# EAGLE board Temp Controller (EAGLE 6.3)
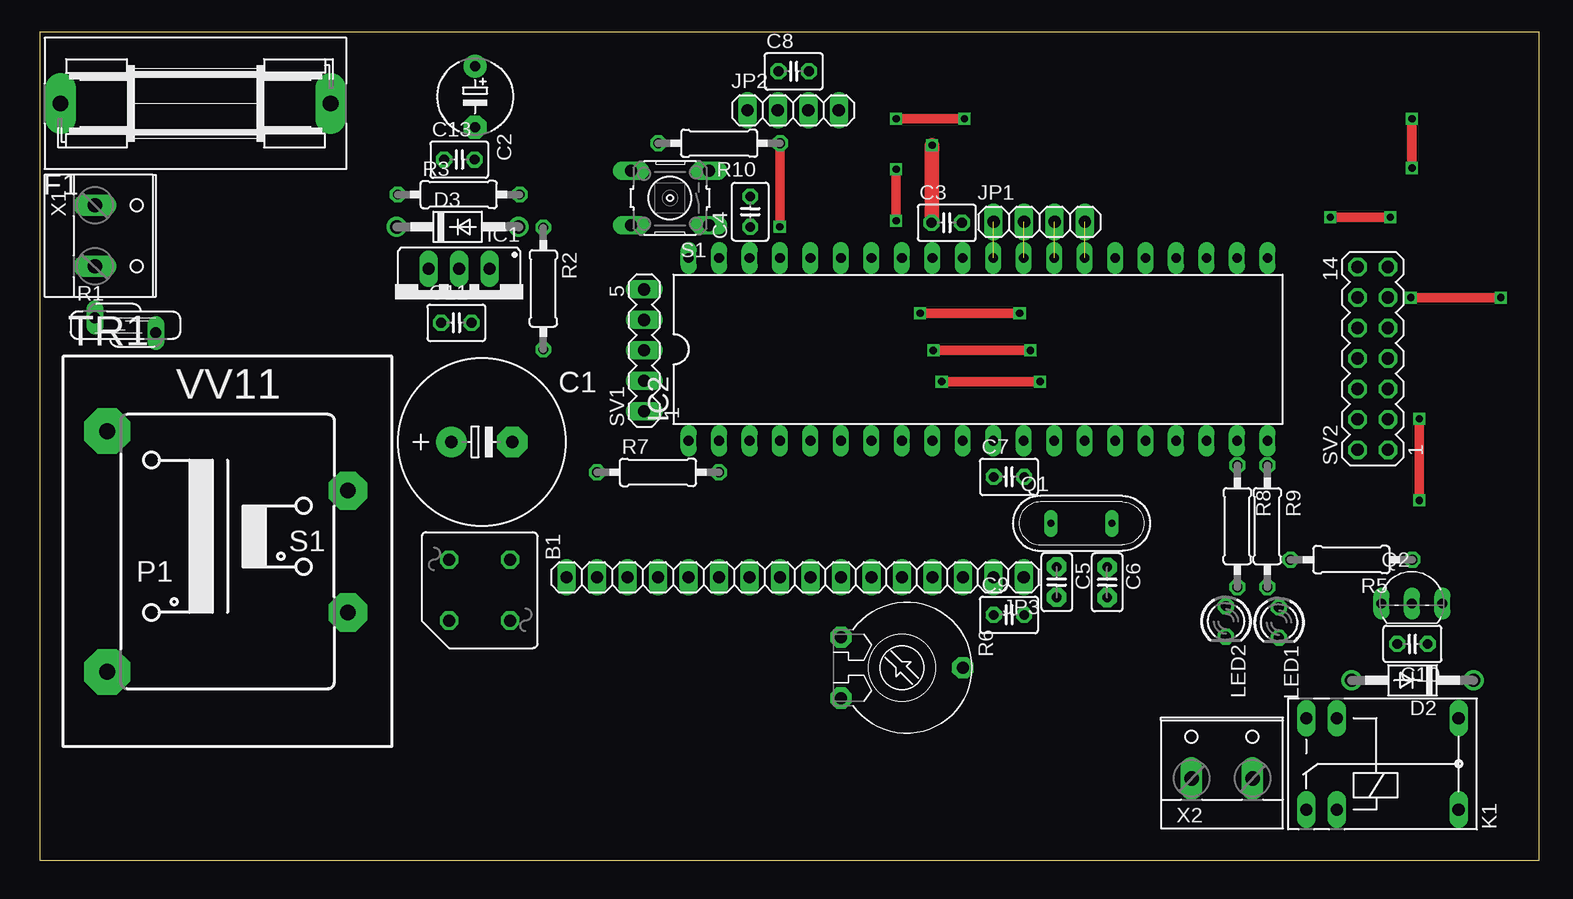
[diagram p0: board, top side]
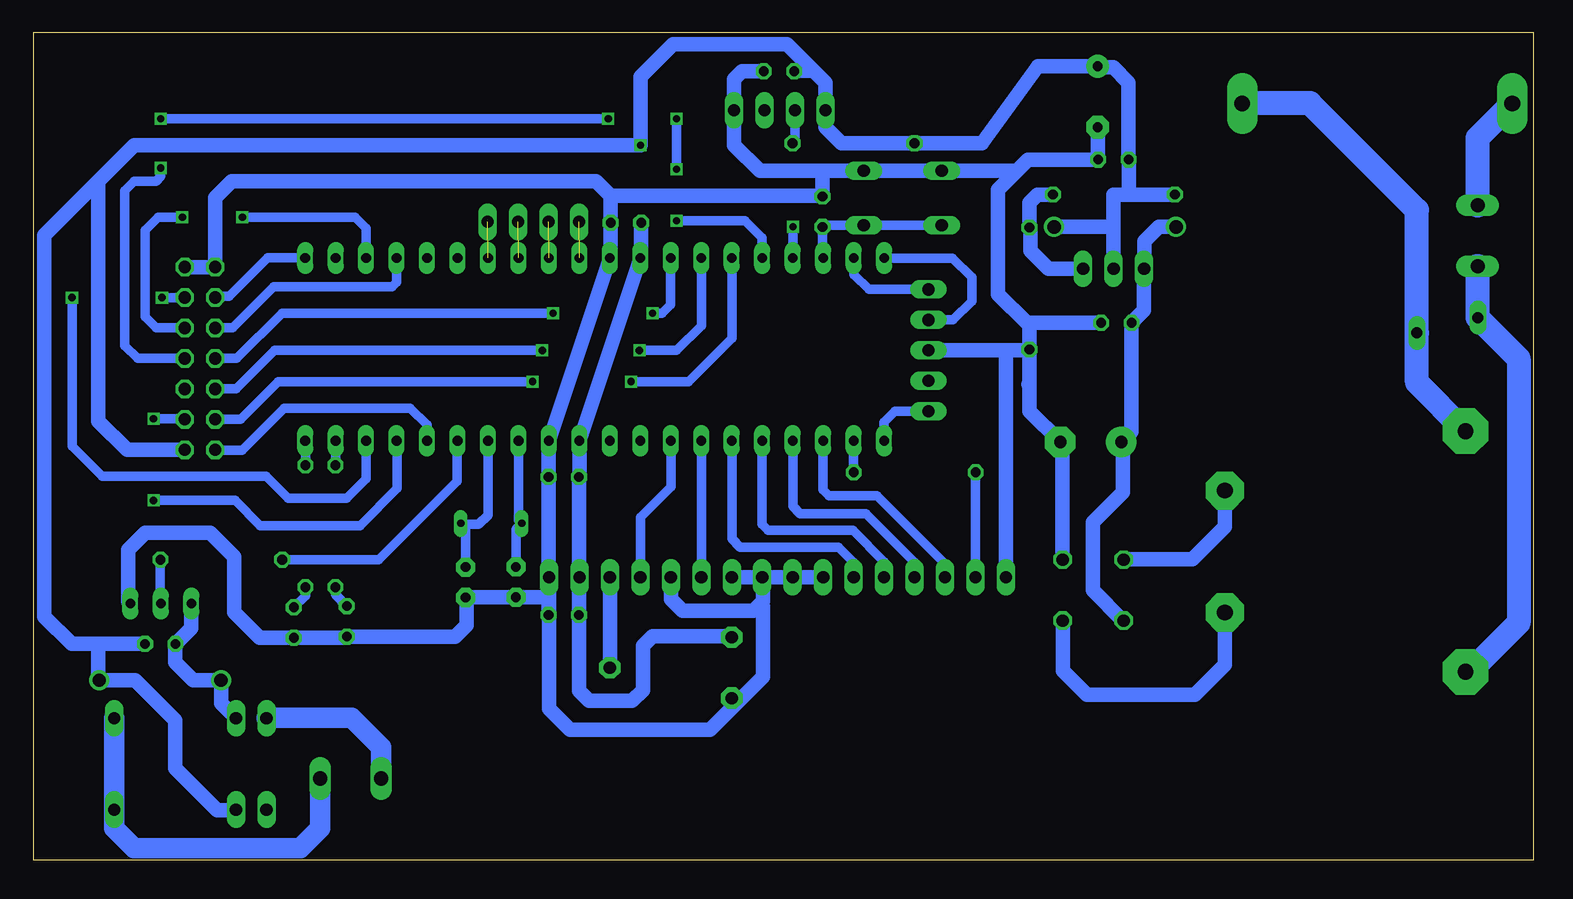
[diagram p1: board, bottom side, seen from below]

Size 125 x 69 mm. Coordinates in mm from the lower left corner, seen from the top.
Outline: 0,0 125,0 125,69 0,69 0,0
Copper layers (1*16): Top 0.035mm / dielectric 1.5mm / Bottom 0.035mm
Design rules "default": minimum track width 10mil, minimum drill 24mil, track to track 8mil, track to pad 8mil, pad to pad 8mil, via to via 8mil, smd to smd 8mil, copper to edge 40mil, drill to drill 8mil, minimum pad ring 10mil, minimum via ring 8mil, stop-mask expansion 4mil, vias tented up to drill 0mil, thermal gap 10mil

## Footprints (pad centres in the part's own frame; a part is rotated, then mirrored left to right if it is on the bottom)
1KAB = drill 1.016 octagon: + 2.54,-2.54; - -2.54,2.54; AC1 -2.54,-2.54; AC2 2.54,2.54
E5-13 = drill 1.016 pad 2.54: + -2.54,0 | drill 1.016 pad 2.54 octagon: - 2.54,0
E5-6 = drill 0.813 pad 1.905: + -2.54,0 | drill 0.813 pad 1.905 octagon: - 2.54,0
C025-030X050 = drill 0.813 octagon: 1 -1.27,0; 2 1.27,0
C2.5-2 = drill 0.813 pad 1.6 octagon: 1 -1.27,0; 2 1.27,0
DO41-10 = drill 1.118: A 5.08,0; C -5.08,0
SH22,5A = drill 1.321 pad 2.54 long: 1 -11.252,0; 2 11.252,0
317TS = drill 1.016 long: 1 -2.54,-2.54; 2 0,-2.54; 3 2.54,-2.54
DIL40 = drill 0.813 long: 1 -24.13,-7.62; 2 -21.59,-7.62; 3 -19.05,-7.62; 4 -16.51,-7.62; 5 -13.97,-7.62; 6 -11.43,-7.62; 7 -8.89,-7.62; 8 -6.35,-7.62; 9 -3.81,-7.62; 10 -1.27,-7.62; 11 1.27,-7.62; 12 3.81,-7.62; 13 6.35,-7.62; 14 8.89,-7.62; 15 11.43,-7.62; 16 13.97,-7.62; 17 16.51,-7.62; 18 19.05,-7.62; 19 21.59,-7.62; 20 24.13,-7.62; 21 24.13,7.62; 22 21.59,7.62; 23 19.05,7.62; 24 16.51,7.62; 25 13.97,7.62; 26 11.43,7.62; 27 8.89,7.62; 28 6.35,7.62; 29 3.81,7.62; 30 1.27,7.62; 31 -1.27,7.62; 32 -3.81,7.62; 33 -6.35,7.62; 34 -8.89,7.62; 35 -11.43,7.62; 36 -13.97,7.62; 37 -16.51,7.62; 38 -19.05,7.62; 39 -21.59,7.62; 40 -24.13,7.62
1X04 = drill 1.016 long: 1 -3.81,0; 2 -1.27,0; 3 1.27,0; 4 3.81,0
1X16 = drill 1.016 long: 1 -19.05,0; 2 -16.51,0; 3 -13.97,0; 4 -11.43,0; 5 -8.89,0; 6 -6.35,0; 7 -3.81,0; 8 -1.27,0; 9 1.27,0; 10 3.81,0; 11 6.35,0; 12 8.89,0; 13 11.43,0; 14 13.97,0; 15 16.51,0; 16 19.05,0
M3XXH = drill 1.016 long: 1 -3.81,3.81; 2 -3.81,-3.81; O -6.35,-3.81; P 6.35,-3.81; P@ 6.35,3.81; S -6.35,3.81
LED3MM = drill 0.813 octagon: A -1.27,0; K 1.27,0
QS = drill 0.61 long: 1 -2.54,0; 2 2.54,0
TO92-EBC = drill 0.813 long: B 0,-1.27; C -2.54,-1.27; E 2.54,-1.27
S07K11 = drill 0.914 long: 1 -0.635,-2.54; 2 0.635,2.54
0207/10 = drill 0.813 octagon: 1 -5.08,0; 2 5.08,0
PT-10 = drill 1.016 pad 1.778 octagon: 1 -2.54,-5.08; 2 2.54,-5.08; 3 0,5.08
B3F-10XX = drill 1.016 long: 1 -3.251,2.261; 2 3.251,2.261; 3 -3.251,-2.261; 4 3.251,-2.261
MA05-1 = drill 1.016 long: 1 -5.08,0; 2 -2.54,0; 3 0,0; 4 2.54,0; 5 5.08,0
MA07-2 = drill 1.016 octagon: 1 -7.62,-1.27; 2 -7.62,1.27; 3 -5.08,-1.27; 4 -5.08,1.27; 5 -2.54,-1.27; 6 -2.54,1.27; 7 0,-1.27; 8 0,1.27; 9 2.54,-1.27; 10 2.54,1.27; 11 5.08,-1.27; 12 5.08,1.27; 13 7.62,-1.27; 14 7.62,1.27
VV11 = drill 1.321 pad 3.81 octagon: 1 -10.033,10.033; 5 -10.033,-10.033 | drill 1.321 pad 3.175 octagon: 7 10.033,-5.08; 9 10.033,5.08
W237-132 = drill 1.194 long: 1 -2.54,-0.635; 2 2.54,-0.635

## Placement (x,y rotation side)
B1  [1KAB]  36.68,22.52 270 top
C1  1000uF  [E5-13]  36.87,34.87 0 top
C2  20uF  [E5-6]  36.3,63.64 270 top
C3  [C025-030X050]  75.62,53.14 0 top
C4  [C025-030X050]  59.24,54.06 90 top
C5  [C2.5-2]  84.79,23.19 270 top
C6  [C2.5-2]  88.99,23.17 270 top
C7  [C025-030X050]  80.81,31.96 0 top
C8  [C025-030X050]  62.86,65.76 0 top
C9  [C025-030X050]  80.81,20.46 0 top
C10  [C025-030X050]  114.44,18.04 180 top
C11  1uF  [C025-030X050]  34.74,44.8 0 top
C13  1uF  [C025-030X050]  34.99,58.4 0 top
D2  1N4004  [DO41-10]  114.45,15.01 180 top
D3  1N4004  [DO41-10]  34.85,52.79 0 top
F1  FUSESH22,5A  [SH22,5A]  13,63.08 0 top
IC1  [317TS]  34.97,46.76 180 top
IC2  PIC16F1939P  [DIL40]  78.23,42.59 0 top
JP1  [1X04]  83.34,53.21 0 top
JP2  [1X04]  62.81,62.51 0 top
JP3  [1X16]  62.99,23.59 180 top
K1  M3XXH  [M3XXH]  111.94,8.04 0 top
LED1  [LED3MM]  103.31,19.82 270 top
LED2  [LED3MM]  98.89,19.92 270 top
Q1  [QS]  86.85,28.09 0 top
Q2  BC549B  [TO92-EBC]  114.39,22.67 0 top
R1  S07K11  [S07K11]  7.15,44.6 270 top
R2  [0207/10]  41.99,47.66 270 top
R3  [0207/10]  34.94,55.49 0 top
R5  [0207/10]  109.35,25.06 180 top
R6  [PT-10]  71.88,16.06 270 top
R7  [0207/10]  51.55,32.34 0 top
R8  [0207/10]  99.84,27.85 270 top
R9  [0207/10]  102.34,27.85 270 top
R10  [0207/10]  56.65,59.76 180 top
S1  [B3F-10XX]  52.55,55.2 180 top
SV1  [MA05-1]  50.4,42.5 90 top
SV2  [MA07-2]  111.13,41.83 90 top
TR1  [VV11]  15.67,25.74 0 top
X1  [W237-132]  5.25,52.06 270 top
X2  [W237-132]  98.57,7.47 0 top

## Library data of the parts
B1 = rectifier
C1-C4 C7-C11 C13 R6 = rcl
C5 C6 = capacitor-wima
D2 D3 = diode
F1 = fuse; OC_FARNELL: unknown; OC_NEWARK: unknown
IC1 = v-reg
IC2 = microchip-update-2
JP1 JP2 = nrf905
JP3 = pinhead
K1 = relay
LED1 LED2 = led
Q1 = special
Q2 = transistor-npn
R1 = varistor
R2 R3 R5 R7-R10 = resistor
S1 = switch-omron
SV1 SV2 = con-lstb
TR1 = trafo
X1 X2 = con-wago-508

## Nets
GND: B1.- C1.- C2.- C3.2 C4.2 C5.2 C6.2 C7.2 C8.2 C9.2 C11.2 C13.2 IC2.12 IC2.31 JP2.4 JP3.1 JP3.5 JP3.7 JP3.8 JP3.9 JP3.10 JP3.16 LED1.K LED2.K Q2.E R2.2 R6.2 S1.3 S1.4 SV1.3 SV2.13 SV2.14
N$1: F1.1 X1.1
N$2: F1.2 R1.2 TR1.1
N$3: R1.1 TR1.5 X1.2
N$4: IC2.33 SV2.8
N$5: B1.AC1 TR1.9
N$6: B1.AC2 TR1.7
N$7: IC2.30 JP1.1
N$8: B1.+ C1.+ C11.1 D3.C IC1.3
N$9: IC2.34 SV2.6
N$10: IC2.18 SV2.11
N$11: IC2.1 SV1.1
N$12: IC2.40 SV1.4
N$13: IC2.39 SV1.5
N$14: C5.1 IC2.13 Q1.1
N$15: C6.1 IC2.14 Q1.2
N$16: IC2.2 R7.2
N$17: IC2.29 JP1.2
N$18: IC2.23 SV2.9
N$19: IC2.24 SV2.10
N$20: IC2.21 SV2.12
N$21: IC2.16 SV2.2
N$22: IC2.17 SV2.3
N$23: JP3.15 R7.1
N$24: IC2.36 SV2.7
N$25: IC2.35 SV2.4
N$26: IC2.3 JP3.14
N$27: IC2.4 JP3.13
N$28: IC2.5 JP3.12
N$29: IC2.6 JP3.11
N$30: IC2.7 JP3.6
N$31: IC2.8 JP3.4
N$32: JP3.3 R6.3
N$34: IC2.28 JP1.3
N$35: IC1.1 R2.1 R3.2
N$36: LED1.A R9.2
N$37: LED2.A R8.2
N$38: IC2.27 JP1.4
N$40: IC2.20 R9.1
N$41: IC2.19 R8.1
N$42: C4.1 IC2.38 S1.1 S1.2
N$43: C10.2 D2.A K1.1 Q2.C
N$44: IC2.15 R5.2
N$45: Q2.B R5.1
N$46: K1.S X2.1
N$47: K1.P K1.P@ X2.2
N$50: IC2.37 JP2.2 R10.1
VCC/2: C2.+ C3.1 C7.1 C8.1 C9.1 C10.1 C13.1 D2.C D3.A IC1.2 IC2.11 IC2.32 JP2.1 JP3.2 K1.2 R3.1 R6.1 R10.2 SV2.1

## Tracks (layer width: path | path; a pad name or v marks a point on that pad's centre or on a via)
GND
  Bottom 1.2: B1.- 39.22,34.68 C1.- 41.99,37.45 41.99,39.8 | 41.99,39.8 R2.2 | 42.2,44.8 C11.2 | 43.04,57.46 44.6,55.9 44.6,47.2 42.2,44.8 | R2.2 41.99,44.59 42.2,44.8 | C3.2 76.89,50.28 IC2.31 IC2.12 82.08,34.93 C7.2 82.08,23.63 JP3.1 | SV2.13 SV2.14 109.86,55.24 108.5,56.6 78.1,56.6 76.9,55.4 | JP3.10 JP3.9 JP3.8 | JP3.8 JP3.7 | JP3.5 71.88,21.78 70.9,20.8 65,20.8 64.4,21.4 | 64.4,21.4 64.2,21.6 64.2,23.53 JP3.8 | R6.2 65.98,13.52 | 65.98,13.52 64.2,15.3 64.2,21.2 64.4,21.4 | C9.2 82.08,21.6 | 82.08,21.6 82.08,23.55 JP3.1 | 82.08,21.6 82.4,21.92 C5.2 88.97,21.92 C6.2 88.9,21.81 88.9,19.6 89.85,18.65 LED2.K 98.99,18.55 LED1.K 106.15,18.55 108.3,20.7 108.3,25.3 110.3,27.3 115.7,27.3 117.1,25.9 117.1,21.57 Q2.E 116.99,21.34 | 59.6,57.46 S1.3 S1.4 43.04,57.46 | 59.6,57.46 64.46,57.46 66.6,59.6 66.6,62.49 JP2.4 66.6,62.53 66.6,65.1 65.94,65.76 C8.2 | 59.6,57.46 59.24,57.1 C4.2 59.31,55.4 76.9,55.4 | 76.9,55.4 C3.2 | C3.2 76.89,53.11 76.9,53.1 | C2.- 36.26,61.06 C13.2 42.1,58.4 43.04,57.46 | 42.09,39.7 41.99,39.8 | JP3.16 43.94,42.24 44.2,42.5 | JP3.1 82.04,12.64 80.3,10.9 68.6,10.9 65.98,13.52 | SV1.3 44.2,42.5 | 44.2,42.5 42.07,42.5 R2.2
N$1
  Bottom 2: X1.1 4.62,60.21 F1.1
N$2
  Bottom 2: TR1.1 9.69,39.83 R1.2 9.69,54.19 18.6,63.1 24.23,63.1 F1.2
N$3
  Bottom 2: X1.2 R1.1 1.2,41.83 1.2,19.8 5.29,15.71 TR1.5
N$4  (via drill 0.6)
  Top 0.8: v81.7,45.6 v73.4,45.6
  Bottom 0.8: SV2.8 108.07,41.83 104.3,45.6 v81.7,45.6 | v73.4,45.6 72.6,45.6 71.9,46.3 71.9,50.19 IC2.33
N$5
  Bottom 1.2: TR1.9 25.7,27.8 28.4,25.1 34.1,25.1 B1.AC1
N$6
  Bottom 1.2: TR1.7 25.7,16.3 28.2,13.8 37.2,13.8 39.2,15.8 39.2,19.96 B1.AC2
N$7  (1 unrouted)
N$8
  Bottom 1.2: B1.+ 34.18,19.98 36.7,22.5 36.7,28.2 34.2,30.7 34.2,34.74 C1.+ 33.47,35.73 C11.1 32.43,45.84 IC1.3 32.4,49.33 32.4,51.6 31.21,52.79 D3.C
N$9  (via drill 0.6)
  Top 0.8: v74.5,42.5 v82.6,42.5
  Bottom 0.8: IC2.34 69.34,44.56 71.4,42.5 v74.5,42.5 | v82.6,42.5 104.9,42.5 108.1,39.3 SV2.6
N$10  (via drill 0.6)
  Top 0.8: v121.8,46.9 v114.3,46.9
  Bottom 0.8: v114.3,46.9 SV2.11 | v121.8,46.9 121.8,34.5 119.3,32 105.6,32 103.8,30.2 98.9,30.2 97.3,31.8 97.3,34.95 IC2.18
N$11
  Bottom 0.8: SV1.1 53.18,37.42 54.1,36.5 IC2.1
N$12
  Bottom 0.8: SV1.4 48.36,45.04 46.8,46.6 46.8,48.6 48.4,50.2 IC2.40
N$13
  Bottom 0.8: SV1.5 55.38,47.58 56.6,48.8 56.6,50.17 IC2.39
N$14
  Bottom 0.8: IC2.13 84.58,28.36 Q1.1 84.79,27.61 C5.1
N$15
  Bottom 0.8: IC2.14 87.12,28.78 87.9,28 88.9,28 | 88.9,28 89.3,28 Q1.2 | C6.1 88.99,27.91 88.9,28
N$16
  Bottom 0.8: IC2.2 R7.2
N$17  (1 unrouted)
N$18  (via drill 0.6)
  Top 0.8: v112.6,53.6 v107.6,53.6
  Bottom 0.8: SV2.9 114.77,44.37 115.7,45.3 115.7,52.5 114.6,53.6 v112.6,53.6 | v107.6,53.6 98.2,53.6 97.3,52.7 97.3,50.23 IC2.23
N$19
  Bottom 0.8: IC2.24 94.74,48.16 95.1,47.8 105,47.8 108.4,44.4 109.83,44.4 SV2.10
N$20
  Bottom 0.8: IC2.21 105.49,50.21 108.7,47 109.77,47 SV2.12
N$21
  Bottom 0.8: IC2.16 92.2,36.3 93.6,37.7 104.1,37.7 107.6,34.2 SV2.2
N$22  (via drill 0.6)
  Top 0.8: v115,36.8 v115,30
  Bottom 0.8: v115,36.8 112.45,36.8 SV2.3 | v115,30 108.2,30 106.1,27.9 97.8,27.9 94.7,31 94.7,34.93 IC2.17
N$23
  Bottom 0.8: R7.1 JP3.15
N$24  (via drill 0.6)
  Top 0.8: v114.4,57.7 v114.4,61.8 | v77.1,61.8 v71.4,61.8 | v71.4,57.6 v71.4,53.3
  Bottom 0.8: SV2.7 116.33,41.83 117.4,42.9 117.4,55.8 116.6,56.6 114.8,56.6 114.4,57 v114.4,57.7 | v114.4,61.8 v77.1,61.8 | v71.4,61.8 v71.4,57.6 | v71.4,53.3 65.7,53.3 64.3,51.9 64.3,50.25 IC2.36
N$25  (via drill 0.6)
  Top 0.8: v83.4,39.9 v75.2,39.9
  Bottom 0.8: SV2.4 107.75,36.75 104.6,39.9 v83.4,39.9 | v75.2,39.9 70.4,39.9 66.8,43.5 IC2.35
N$26
  Bottom 0.8: JP3.14 49.02,24.72 54.7,30.4 58.7,30.4 59.2,30.9 59.2,34.95 IC2.3
N$27
  Bottom 0.8: JP3.13 51.56,24.86 55.6,28.9 61.1,28.9 61.7,29.5 61.7,34.95 IC2.4
N$28
  Bottom 0.8: JP3.12 54.1,24.9 56.7,27.5 63.8,27.5 64.3,28 64.3,34.93 IC2.5
N$29
  Bottom 0.8: JP3.11 56.64,24.84 57.9,26.1 66.1,26.1 66.8,26.8 IC2.6
N$30
  Bottom 0.8: IC2.7 JP3.6
N$31
  Bottom 0.8: IC2.8 71.88,31.12 74.4,28.6 74.4,23.61 JP3.4
N$32
  Bottom 1.2: R6.3 JP3.3
N$34  (1 unrouted)
N$35
  Bottom 1.2: IC1.1 40.4,49.3 41.9,50.8 41.9,52.65 R2.1 42,54.8 41.31,55.49 R3.2
N$36
  Bottom 0.8: R9.2 102.34,22.06 LED1.A
N$37
  Bottom 0.8: R8.2 99.84,22.14 LED2.A
N$38  (1 unrouted)
N$40
  Bottom 0.8: R9.1 102.34,34.95 IC2.20
N$41
  Bottom 0.8: IC2.19 99.82,32.95 R8.1
N$42
  Bottom 0.8: S1.2 S1.1 59.09,52.94 C4.1 59.24,50.27 IC2.38
N$43
  Bottom 1.2: Q2.C 111.85,19.36 C10.2 113.2,18.01 113.2,16.5 111.71,15.01 D2.A 109.37,13.09 K1.1
N$44
  Bottom 0.8: R5.2 96.24,25.06 89.7,31.6 89.7,34.93 IC2.15
N$45
  Bottom 0.8: R5.1 114.43,21.44 Q2.B
N$46
  Bottom 1.7: X2.1 96.03,9.43 98.5,11.9 105.54,11.9 K1.S
N$47
  Bottom 1.7: X2.2 101.11,2.69 102.8,1 116.6,1 118.3,2.7 K1.P K1.P@
N$50  (via drill 0.6)
  Top 0.8: R10.1 61.73,52.83 v61.7,52.8
  Bottom 0.8: JP2.2 61.54,59.95 R10.1 | v61.7,52.8 61.7,50.23 IC2.37
VCC/2  (via drill 0.6)
  Top 1.2: v74.4,59.6 74.4,53.19 C3.1
  Bottom 1.2: 32.59,55.49 R3.1 33.7,55.49 | 33.7,55.49 33.7,58.38 C13.1 33.72,64.82 35,66.1 36.22,66.1 C2.+ 36.32,66.2 41.3,66.2 45.94,59.76 R10.2 57.66,59.76 59,61.1 JP2.1 59,64.8 60,65.8 | D3.A 35,52.79 | IC1.2 35,49.33 35,52.79 | 33.7,55.49 35,55.49 35,52.79 | SV2.1 117.21,34.21 119.6,36.6 119.6,56.6 | 119.6,56.6 116.6,59.6 v74.4,59.6 74.4,65.3 71.7,68 62.2,68 60,65.8 | R6.1 66.9,18.7 73.4,18.7 74.2,17.9 74.2,14.2 75.1,13.3 78.7,13.3 79.54,14.14 C9.1 79.54,23.55 JP3.2 79.54,23.63 C7.1 79.5,32 IC2.11 IC2.32 74.35,50.28 C3.1 74.4,53.19 | K1.2 108.16,4.2 109.7,4.2 113.2,7.7 113.2,11.7 116.51,15.01 D2.C 119.6,15.08 119.6,18.04 C10.1 121.84,18.04 124.1,20.3 124.1,52.1 119.6,56.6 | 60,65.8 61.55,65.8 C8.1